# Altium PCB CONTROL_BOARD.PcbDoc
Units mm, origin at the board's own origin, x right, y up, seen from the top; angles counter-clockwise.
Board outline 160.2 x 80.2 mm, 2 copper layers (Top Layer, Bottom Layer); 15 components, 43 nets, 51 pads, 0 vias.
Unrouted connection lines stored in the file: 32.
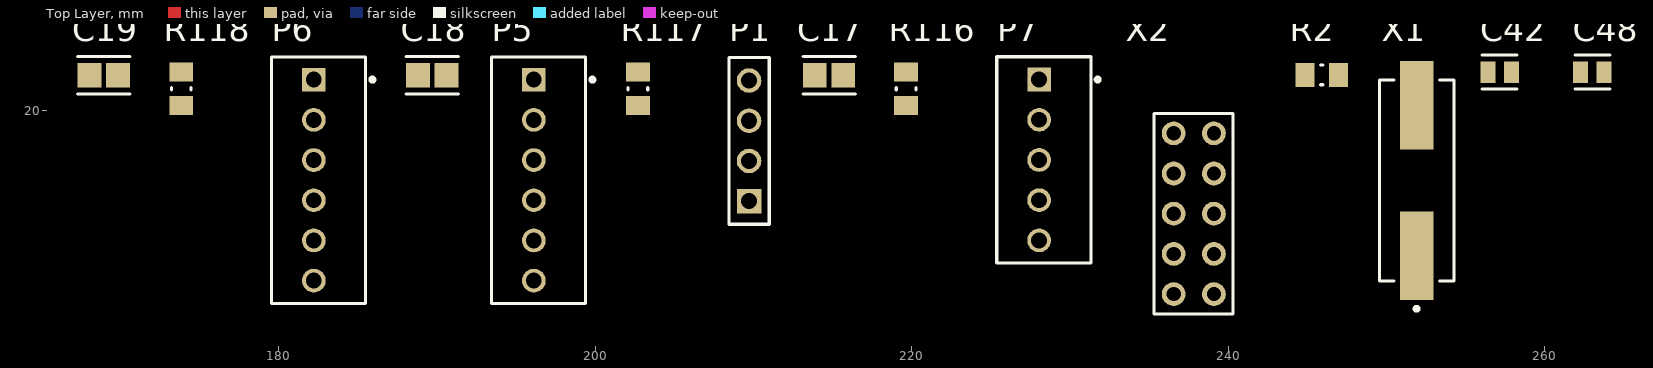
[diagram p0: Top Layer view]
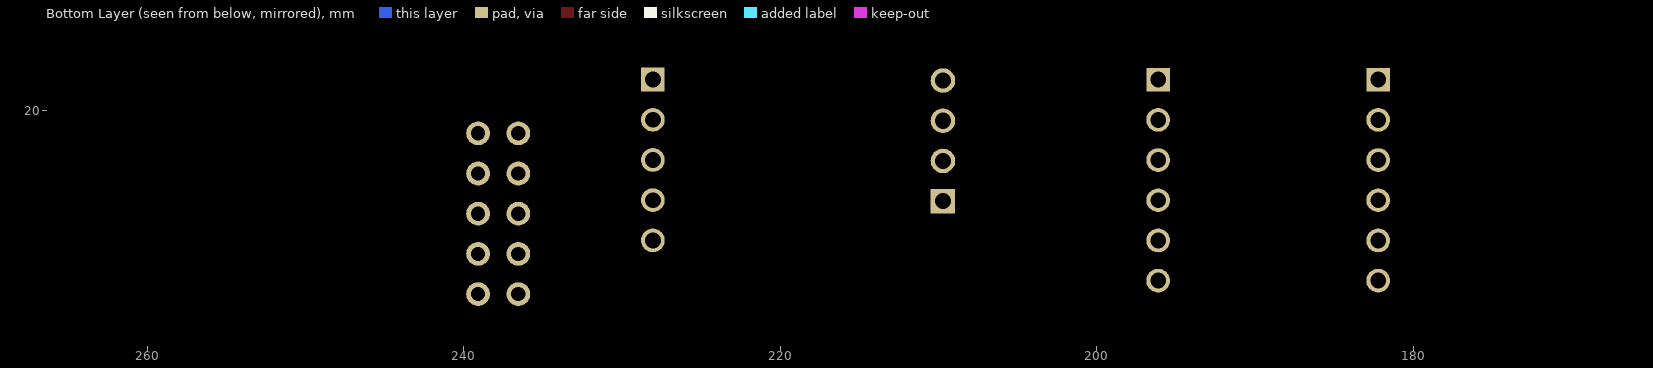
[diagram p1: Bottom Layer view, seen from below]

## Layer stack, top to bottom
Top Solder: solder mask 0.0102, Solder Resist, Dk 3.5
Top Layer: signal copper 0.0356
Dielectric 1: dielectric 0.32, FR-4, Dk 4.8
Bottom Layer: signal copper 0.0356
Bottom Solder: solder mask 0.0102, Solder Resist, Dk 3.5

## Board outline
4.999,-0.1 ccw(c5,-0.004) 5,-0.1 154.999,-0.1 155,-0.1 ccw(c155,5) 160.1,5 160.1,74.999 ccw(c160,75) 160.1,75 ccw(c155,75) 155,80.1 5.002,80.1 ccw(c5,80) 5,80.1 ccw(c5,75) -0.1,75.001 ccw(c1.175,75) -0.1,75 cw(c-0.035,75) -0.1,75.001 -0.1,75 -0.1,4.791 ccw(c0,4.791) -0.095,4.757 ccw(c5,5)
cut-out: 5,73.5 cw(c5,75) 3.5,75 cw(c5,75) 5,76.5 cw(c5,75) 6.5,75 cw(c5,75)
cut-out: 3.5,5 ccw(c5,5) 5,3.5 ccw(c5,5) 6.5,5 ccw(c5,5) 5,6.5 ccw(c5,5)
cut-out: 153.5,5 ccw(c155,5) 155,3.5 ccw(c155,5) 156.5,5 ccw(c155,5) 155,6.5 ccw(c155,5)
cut-out: 153.5,75 ccw(c155,75) 155,73.5 ccw(c155,75) 156.5,75 ccw(c155,75) 155,76.5 ccw(c155,75)

## Design rules (kind name [scope] priority, off if disabled: settings)
Clearance HV [InNetClass('All Nets') vs InNetClass('HV')] p1: gap=0.4 ignorepadtopadclearanceinfootprint=FALSE except(0: Arc-Arc Arc-Track Track-Track Via-Via Via-Fill Via-Poly Via-Region Via-Text Via-Hole Text-Text Text-Hole; 0.1: Arc-SMDPad Track-SMDPad; 0.3: Arc-THPad Arc-Via Arc-Fill Arc-Poly Arc-Region Arc-Text Arc-Hole Track-THPad Track-Via Track-Fill Track-Poly Track-Region Track-Text Track-Hole)
Clearance Clearance_1 [All] p2: gap=0.1 ignorepadtopadclearanceinfootprint=TRUE
Clearance GND [InNet('GND')] p3: gap=0.15 ignorepadtopadclearanceinfootprint=TRUE except(0.4: Fill-Fill Fill-Poly Fill-Region Fill-Text Fill-Hole Poly-Poly Poly-Region Poly-Text Poly-Hole Region-Region Region-Text Region-Hole)
ComponentClearance [All] p1: gap=-2.254 collisioncheckmode=3 verticalgap=0.254 showdistances=FALSE
DiffPairsRouting [All] p1: maxlimit=0.254 minlimit=0.1 mostfreqgap=0.254 toplayer_minwidth=0.3 toplayer_maxwidth=2 toplayer_prefwidth=0.3 bottomlayer_minwidth=0.3 bottomlayer_maxwidth=2 bottomlayer_prefwidth=0.3 maxuncoupledlength=12.7
Height [All] p1: minheight=0 maxheight=55.4 prefheight=12.7
HoleSize [All] p1: absolutevalues=TRUE maxlimit=5 minlimit=0.025 maxpercent=80.000 minpercent=20.000
HoleToHoleClearance [All] p1: gap=0 allowstackedmicrovias=TRUE
LayerPairs [All] p1 off: enforce=TRUE
MinimumSolderMaskSliver [All] p1: minsoldermaskwidth=0.01
PasteMaskExpansion [All] p1: expansion=0.5
PlaneClearance [All] p1: clearance=0.1
PlaneConnect [All] p1: planeconnectstyle=Direct reliefexpansion=0.508 reliefentries=4 reliefconductorwidth=0.254 reliefairgap=0.254
PolygonConnect [All] p1: connectstyle=Direct reliefconductorwidth=0.254 reliefentries=4 polygonreliefangle="90 Angle" airgapwidth=0.254
RoutingVias [All] p1: holewidth=0.4 width=0.8 viastyle="Through Hole" minholewidth=0.254 minwidth=0.5 maxholewidth=0.75 maxwidth=1.5
ShortCircuit [All] p1: allowed=TRUE
SilkToSilkClearance [All] p1 off: silktosilkclearance=0.01
SilkToSolderMaskClearance [All] p1: minsilkscreentomaskgap=0 clearancetoexposedcopper=TRUE
SolderMaskExpansion [All] p1: expansion=0.15 istentingtop=FALSE
Width [All] p1: maxlimit=10 minlimit=0.254 preferedwidth=2
17 further rules are at their usual default settings.

## Components (designator, comment, footprint, x,y, rotation, side; value= is the part's Value field where it differs from the comment)
C17 "C0805C224K5RACTU" FP-C0805C-DN-IPC_A 214.782,22.211 r0 top value="0.22 μF"
C18 "C0805C224K5RACTU" FP-C0805C-DN-IPC_A 189.706,22.211 r0 top value="0.22 μF"
C19 "C0805C224K5RACTU" FP-C0805C-DN-IPC_A 168.955,22.211 r0 top value="0.22 μF"
C42 "16pF" FP-C0805C-DN-MFG 257.159,22.411 r0 top value="0.22 μF"
C48 "16pF" FP-C0805C-DN-MFG 263.009,22.411 r0 top value="0.22 μF"
P1 "TSW-104-08-G-S" SMTC-TSW-104-08-X-S 209.732,14.26 r90 top
P5 "61900611121" 61900611121 196.431,15.585 r90 top
P6 "61900611121" 61900611121 182.53,15.585 r90 top
P7 "61900511121" 61900511121 228.358,16.86 r90 top
R2 "10K" Vishay_CRCW0805-e3_IPC_A 245.908,22.236 r0 top
R116 "10K" FP-CRCW0805-e3-IPC_A 219.657,21.361 r90 top
R117 "10K" FP-CRCW0805-e3-IPC_A 202.706,21.361 r90 top
R118 "10K" FP-CRCW0805-e3-IPC_A 173.855,21.361 r90 top
X1 "ABLS-16.000MHZ-B4-T" ABRA-ABLS-14.7456MHZ-B2-T_V 251.909,15.56 r90 top
X2 "BH-10" BH-10 236.558,8.385 r90 top

## Footprints (in the part's own frame and the unit in brackets; to place one, negate y for a bottom-side part, rotate by r counter-clockwise, add the part's x,y. Pads: shape width x height; smd on the part's side, far side on the other; paste and mask are expansions set on the pad)
61900511121 [mm] "2.54mm Male Locking Header, 5p"
  rect 1.5x1.5 hole 1: 1(5.08,0.3)
  round 1.5 hole 1: 2(2.54,0.3) 3(0,0.3) 4(-2.54,0.3) 5(-5.08,0.3)
  silkscreen extent -6.52,-3.52 6.52,2.98, body extent -6.35,-2.9 6.35,2.9, height 11.53
61900611121 [mm] "2.54mm Male Locking Header, 6p"
  rect 1.5x1.5 hole 1: 1(6.35,0.3)
  round 1.5 hole 1: 2(3.81,0.3) 3(1.27,0.3) 4(-1.27,0.3) 5(-3.81,0.3) 6(-6.35,0.3)
  silkscreen extent -7.79,-3.52 7.79,2.98, body extent -7.62,-2.9 7.62,2.9, height 11.53
ABRA-ABLS-14.7456MHZ-B2-T_V [mm] "SMD, 2-Leads, Body 11.4x4.7mm"
  rect 5.6x2.1 smd: 1(-4.75,0) 2(4.75,0)
  silkscreen extent -8.22,-2.35 6.35,2.35, body extent -6.35,-2.35 6.35,2.35, height 4.16
BH-10 [mm]
  round 1.5 hole 0.9: 1(0,0) 2(2.54,0) 3(5.08,0) 4(7.62,0) 5(10.16,0) 6(0,-2.54) 7(2.54,-2.54) 8(5.08,-2.54) 9(7.62,-2.54) 10(10.16,-2.54)
  silkscreen extent -1.25,-3.75 11.41,1.25, body extent -5.07,-5.82 15.23,3.28, height 9
FP-C0805C-DN-IPC_A [mm]
  rect 1.505x1.556 smd paste+0 mask+0: 1(-0.901,0) 2(0.901,0)
  silkscreen extent -1.65,-1.18 1.65,1.18, body extent -2.15,-1.28 2.15,1.28, height 0.25
FP-C0805C-DN-MFG [mm]
  rect 0.95x1.35 smd paste+0 mask+0: 1(-0.75,0) 2(0.75,0)
  silkscreen extent -1.1,-1.07 1.1,1.07, body extent -1.4,-0.85 1.4,0.85, height 0.25
FP-CRCW0805-e3-IPC_A [mil]
  rect 47.5x59.38 smd paste+0 mask+0: 1(-41.37,0) 2(41.37,0)
  silkscreen extent -3,-25 3,25, body extent -85,-49 85,49, height 10
SMTC-TSW-104-08-X-S [mm] ".025 SQ Post Terminal Strip Assembly, 1x4 Pins, Vertical, 2.54mm Pitch, Male"
  rect 1.55x1.55 hole 1.02: 1(0,0)
  round 1.55 hole 1.02: 2(2.54,0) 3(5.08,0) 4(7.62,0)
  silkscreen extent -1.46,-1.27 9.08,1.27, body extent -1.27,-1.27 8.89,1.27, height 8.38
Vishay_CRCW0805-e3_IPC_A [mil]
  rect 47.5x59.38 smd paste+0 mask+0: 1(-41.37,0) 2(41.37,0)
  silkscreen extent -3,-25 3,25, body extent -85,-49 85,49, height 10

## Part data
C17 C18 C19: library part CMP-1036-04552-2, "CAP CER 0.22UF 50V X7R 0805", Capacitance="0.22 μF", Manufacturer=KEMET, Package=C0805C-DN, Temperature="-55°C to +125°C", Temperature Characteristic=X7R, Temperature Coefficient=30ppm/°C, Temperature Range High=+125°C, Temperature Range Low=-55°C, Tolerance=0.1, Voltage Rating="50 V", Automotive=No, Category=Cap, ComponentLink2Description=Datasheet, ComponentLink2URL=https://content.kemet.com/datasheets/KEM_C1003_C0G_SMD.pdf, Device Class L1="Passive Components", Device Class L2=Capacitors, Device Class L3="Ceramic Capacitors", Digikey Description="CAP CER 0.22UF 50V X7R 0805", Height=0.88mm, Ipc Land Pattern Name=CAPC200125X78, Lead Free=Yes, Manufacturer Part Number=C0805C224K5RACTU, Material=Ceramic, Mouser Description="CAP CER 0.22UF 50V X7R 0805", Octopart=https://octopart.com/c0805c224k5ractu-kemet-144670, RoHS=TRUE
C42 C48: library part CMP-1036-04552-2, "CAP CER 16pF 50V X7R 0805", Capacitance="0.22 μF", Manufacturer=KEMET, Manufacturer Part Number=C0805C224K5RACTU, Package=C0805C-DN, Temperature="-55°C to +125°C", Temperature Characteristic=X7R, Temperature Coefficient=30ppm/°C, Temperature Range High=+125°C, Temperature Range Low=-55°C, Tolerance=0.1, Voltage Rating="50 V", Automotive=No, Category=Cap, ComponentLink2Description=Datasheet, ComponentLink2URL=https://content.kemet.com/datasheets/KEM_C1003_C0G_SMD.pdf, Device Class L1="Passive Components", Device Class L2=Capacitors, Device Class L3="Ceramic Capacitors", Digikey Description="CAP CER 0.22UF 50V X7R 0805", Height=0.88mm, Ipc Land Pattern Name=CAPC200125X78, Lead Free=Yes, Material=Ceramic, Mouser Description="CAP CER 0.22UF 50V X7R 0805", Octopart=https://octopart.com/c0805c224k5ractu-kemet-144670, RoHS=TRUE
P1: library part CMP-1024-00357-1, "0.025\" SQ Post Header, Through-hole, Vertical, -55 to 125 degC, 2.54 mm Pitch, 4-Pin, Male, RoHS", Manufacturer=Samtec, Temperature Range="-55 to 125 degC", ComponentLink1Description="Manufacturer URL", ComponentLink1URL=http://www.samtec.com, ComponentLink2Description=Datasheet, ComponentLink2URL=http://www.samtec.com/documents/webfiles/pdf/TSW_TH.PDF, ComponentLink3Description="Package Specification", ComponentLink3URL=http://www.samtec.com/documents/webfiles/cpdf/TSW-XXX-XX-XXX-X-XX-XXX-MKT.pdf, DatasheetVersion=F-214, Mounting Technology=Through-hole, Orientation=Vertical, PackageDescription=".025[0.64] SQ. Post Terminal Strip Assembly", PackageReference=TSW-104-08-X-S, PackageVersion="DM, 8/1988", PartNumber=TSW-104-08-G-S, Pitch="2.54 mm", RoHS=True
P5 P6: "WR-WTB THT Male Vertical Locking Header, pitch 2.54mm, 6p", Contact Resistance=20mOhm, Operating Temperature="-40 to +105degC", Rated Current=3A, Withstanding Voltage=1000VAC, Working Voltage=250VAC, ComponentLink1Description=Manufacturer, ComponentLink1URL=http://www.we-online.de, ComponentLink2Description=Datasheet, ComponentLink2URL=https://www.we-online.com/catalog/datasheet/61900611121.pdf, Gender=Male, Mounting Technology=THT, Packaging=Bag, Part Number=61900611121, Pin Number=6, Pitch=2.54mm, Published Date="January 2020", Publisher="Wurth Elektronik", Type=Vertical
P7: "WR-WTB THT Male Vertical Locking Header, pitch 2.54mm, 5p", Contact Resistance=20mOhm, Operating Temperature="-40 to +105degC", Rated Current=3A, Withstanding Voltage=1000VAC, Working Voltage=250VAC, ComponentLink1Description=Manufacturer, ComponentLink1URL=http://www.we-online.de, ComponentLink2Description=Datasheet, ComponentLink2URL=https://www.we-online.com/catalog/datasheet/61900511121.pdf, Gender=Male, Mounting Technology=THT, Packaging=Bag, Part Number=61900511121, Pin Number=5, Pitch=2.54mm, Published Date="January 2020", Publisher="Wurth Elektronik", Type=Vertical
R2: library part CRCW08050000Z0EA
R116 R117 R118: library part CMP-2001-04908-2, "RES Thick Film, 10kΩ, 1%, 0.125W, 100ppm/°C, 0805", Case Code (Imperial)=0805, Case Code (Metric)=2012, Max Operating Temperature=155°C, Min Operating Temperature=-55°C, Package Quantity=5000, Power Rating=125mW, Resistance=10kR, Temperature Coefficient=100ppm/°C, Tolerance=1%, Voltage Rating=150V, Case/Package=0805, Composition="Thick Film", Contact Plating=Tin, Depth=1.25mm, Height=0.45mm, Lead Free="Lead Free", Length=2mm, Military Standard=Not, Packaging="Tape and Reel", Radiation Hardening=No, Termination=SMD/SMT, Voltage Rating (DC)=150V, Weight=0.000194oz, Width=1.25mm
X1: library part CMP-2000-05726-1, "Low Profile Crystal, 16.0 MHz, +/- 30 ppm, -20 to 70 degC, 2-Pin SMD, RoHS, Tape and Reel", Case Height=4.2mm, Case Length=11.4mm, Case Width=4.7mm, Frequency=8MHz, Frequency Stability=50PPM, Load Capacitance=18pF, Manufacturer=ABRACON, Operating Temperature Range=-20Cto+70C, Package / Case=HC-49/US, Package Description="2-Pin Surface Mount Device, Body 11.4 x 4.7 mm", Package Reference=ABLS-14.7456MHZ-B2-T, Tolerance=30PPM, Brand=ABRACON, Datasheet URL=http://www.abracon.com/Resonators/abls.pdf, Datasheet Version=04/2011, Dimensions=4.7mmWx11.4mmLx4.2mmH, ESR=80Ohms, Factory Pack Quantity=1000, Manufacturer URL=http://www.abracon.com/, Mounting Style=SMD/SMT, Mounting Technology=SurfaceMount, Package URL=http://www.abracon.com/Support/PackageDrawing/Resonators/ABLS-2D.pdf, Packaging=Reel, Product Category=Crystals, RoHS=Details, Series=ABLS, Termination Style=SMD/SMT, Type=LowProfileMicroprocessorCrystal

## Nets (pads, with @x,y where several pads share a name; then routed paths per layer and width w, separated by ;. In a path a pad name is that pad's centre, name@x,y a point inside that pad or via, vN(x,y) a via of type N, cw(c..) or ccw(c..) an arc to the next point about the centre after c; other vN are vias at no path point)
+3V3: P1.1 P5.1 P6.1 P7.4 X2.2
+5V: P5.2 P7.5 X2.1
GND: C17.1 C18.1 C19.1 C42.2 C48.2 P1.4 P5.6 P6.6 P7.1 R2.2 X2.3
NetC17_2: C17.2 R116.1 X2.8
NetC18_2: C18.2 R117.1 X2.6
NetC19_2: C19.2 R118.1 X2.7
NetC42_1: C42.1 X1.1
NetC48_1: C48.1 X1.2
NetP1_2: P1.2 P6.2
NetP1_3: P1.3 P6.3
NetP5_3: P5.3 X2.9
NetP5_4: P5.4 X2.10
NetP5_5: P5.5
NetP6_4: P6.4
NetP6_5: P6.5
NetP7_2: P7.2 X2.5
NetP7_3: P7.3 X2.4
NetR2_1: R2.1
NetR116_2: R116.2 R117.2 R118.2
NetU4_4: 
NetU4_7: 
NetU4_10: 
NetU4_11: 
NetU4_13: 
NetU4_14: 
NetU4_15: 
NetU4_16: 
NetU4_17: 
NetU4_18: 
NetU4_19: 
NetU4_20: 
NetU4_21: 
NetU4_22: 
NetU4_25: 
NetU4_26: 
NetU4_28: 
NetU4_29: 
NetU4_30: 
NetU4_31: 
NetU4_32: 
NetU4_33: 
NetU4_38: 
NetU4_39: 

## Silkscreen, mask and mechanical layers (free items; w line width, h text height)
Mechanical 1:
  circle w0.254: c5,5 r1.5
  circle w0.254: c5,75 r1.5
  circle w0.254: c155,75 r1.5
  circle w0.254: c155,5 r1.5
  lines w0.2: 0,4.791 0,75 cw(c5,75) 5,80 155,80 cw(c155,75) 160,75 160,5 cw(c155,5) 155,0 5,0 cw(c5,5) 0,5